# EAGLE board CouplerDC_Quad_v1 (EAGLE 9.2.2)
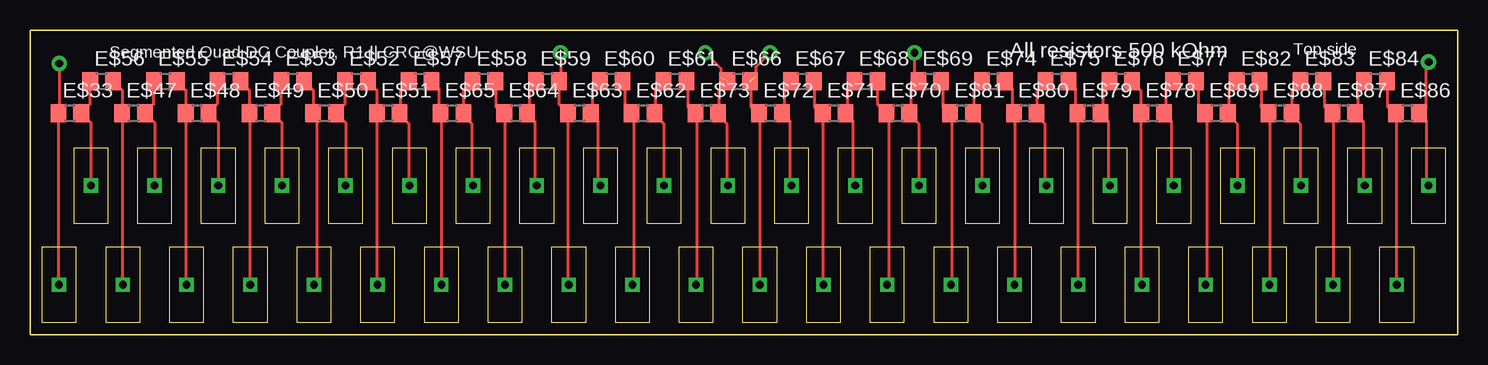
[diagram p0: board, top side]

Size 118.97 x 25.4 mm. Coordinates in mm from the lower left corner, seen from the top.
Outline: 0,0 118.97,0 118.97,25.4 0,25.4 0,0
Copper layers (1*16): Top 0.035mm / dielectric 1.5mm / Bottom 0.035mm
Design rules "default": minimum track width 10mil, minimum drill 24mil, track to track 8mil, track to pad 8mil, pad to pad 8mil, via to via 8mil, smd to smd 8mil, copper to edge 40mil, drill to drill 8mil, minimum pad ring 10mil, minimum via ring 8mil, stop-mask expansion 4mil, vias tented up to drill 0mil, thermal gap 10mil
Milling: 4 lines

## Footprints (pad centres in the part's own frame; a part is rotated, then mirrored left to right if it is on the bottom)
SLOT_QUAD_V1 = drill 0.635 pad 1.194 square: P$1 0,0
R0805 = smd 1.3 x 1.5: 1 -0.95,0; 2 0.95,0

## Placement (x,y rotation side)
E$1  [SLOT_QUAD_V1]  2.43,4.17 90 top
E$3  [SLOT_QUAD_V1]  5.07,12.43 90 top
E$4  [SLOT_QUAD_V1]  7.74,4.17 90 top
E$5  [SLOT_QUAD_V1]  13.04,4.17 90 top
E$6  [SLOT_QUAD_V1]  18.35,4.17 90 top
E$7  [SLOT_QUAD_V1]  23.66,4.17 90 top
E$8  [SLOT_QUAD_V1]  10.38,12.43 90 top
E$9  [SLOT_QUAD_V1]  28.97,4.17 90 top
E$10  [SLOT_QUAD_V1]  15.69,12.43 90 top
E$11  [SLOT_QUAD_V1]  34.28,4.17 90 top
E$12  [SLOT_QUAD_V1]  39.58,4.17 90 top
E$13  [SLOT_QUAD_V1]  21,12.43 90 top
E$14  [SLOT_QUAD_V1]  44.89,4.17 90 top
E$15  [SLOT_QUAD_V1]  50.2,4.17 90 top
E$16  [SLOT_QUAD_V1]  55.51,4.17 90 top
E$17  [SLOT_QUAD_V1]  60.82,4.17 90 top
E$18  [SLOT_QUAD_V1]  26.3,12.43 90 top
E$19  [SLOT_QUAD_V1]  31.61,12.43 90 top
E$20  [SLOT_QUAD_V1]  66.12,4.17 90 top
E$21  [SLOT_QUAD_V1]  71.43,4.17 90 top
E$22  [SLOT_QUAD_V1]  76.74,4.17 90 top
E$23  [SLOT_QUAD_V1]  82.05,4.17 90 top
E$24  [SLOT_QUAD_V1]  87.36,4.17 90 top
E$25  [SLOT_QUAD_V1]  92.66,4.17 90 top
E$26  [SLOT_QUAD_V1]  97.97,4.17 90 top
E$27  [SLOT_QUAD_V1]  103.28,4.17 90 top
E$28  [SLOT_QUAD_V1]  108.59,4.17 90 top
E$29  [SLOT_QUAD_V1]  113.9,4.17 90 top
E$30  [SLOT_QUAD_V1]  36.92,12.43 90 top
E$31  [SLOT_QUAD_V1]  42.23,12.43 90 top
E$32  [SLOT_QUAD_V1]  47.54,12.43 90 top
E$33  [R0805]  3.32,18.48 0 top
E$34  [SLOT_QUAD_V1]  52.84,12.43 90 top
E$35  [SLOT_QUAD_V1]  58.15,12.43 90 top
E$36  [SLOT_QUAD_V1]  63.46,12.43 90 top
E$37  [SLOT_QUAD_V1]  68.77,12.43 90 top
E$38  [SLOT_QUAD_V1]  74.08,12.43 90 top
E$39  [SLOT_QUAD_V1]  79.38,12.43 90 top
E$40  [SLOT_QUAD_V1]  84.69,12.43 90 top
E$41  [SLOT_QUAD_V1]  90,12.43 90 top
E$42  [SLOT_QUAD_V1]  95.31,12.43 90 top
E$43  [SLOT_QUAD_V1]  100.62,12.43 90 top
E$44  [SLOT_QUAD_V1]  105.92,12.43 90 top
E$45  [SLOT_QUAD_V1]  111.23,12.43 90 top
E$46  [SLOT_QUAD_V1]  116.54,12.43 90 top
E$47  [R0805]  8.62,18.48 0 top
E$48  [R0805]  13.93,18.48 0 top
E$49  [R0805]  19.24,18.48 0 top
E$50  [R0805]  24.55,18.48 0 top
E$51  [R0805]  29.86,18.48 0 top
E$52  [R0805]  27.2,21.14 0 top
E$53  [R0805]  21.89,21.14 0 top
E$54  [R0805]  16.59,21.14 0 top
E$55  [R0805]  11.28,21.14 0 top
E$56  [R0805]  5.97,21.14 0 top
E$57  [R0805]  32.51,21.14 0 top
E$58  [R0805]  37.82,21.14 0 top
E$59  [R0805]  43.13,21.14 0 top
E$60  [R0805]  48.43,21.14 0 top
E$61  [R0805]  53.74,21.14 0 top
E$62  [R0805]  51.09,18.48 0 top
E$63  [R0805]  45.78,18.48 0 top
E$64  [R0805]  40.47,18.48 0 top
E$65  [R0805]  35.16,18.48 0 top
E$66  [R0805]  59.05,21.14 0 top
E$67  [R0805]  64.36,21.14 0 top
E$68  [R0805]  69.67,21.14 0 top
E$69  [R0805]  74.97,21.14 0 top
E$70  [R0805]  72.32,18.48 0 top
E$71  [R0805]  67.01,18.48 0 top
E$72  [R0805]  61.7,18.48 0 top
E$73  [R0805]  56.4,18.48 0 top
E$74  [R0805]  80.28,21.14 0 top
E$75  [R0805]  85.59,21.14 0 top
E$76  [R0805]  90.9,21.14 0 top
E$77  [R0805]  96.21,21.14 0 top
E$78  [R0805]  93.55,18.48 0 top
E$79  [R0805]  88.24,18.48 0 top
E$80  [R0805]  82.94,18.48 0 top
E$81  [R0805]  77.63,18.48 0 top
E$82  [R0805]  101.52,21.14 0 top
E$83  [R0805]  106.82,21.14 0 top
E$84  [R0805]  112.13,21.14 0 top
E$86  [R0805]  114.78,18.48 0 top
E$87  [R0805]  109.48,18.48 0 top
E$88  [R0805]  104.17,18.48 0 top
E$89  [R0805]  98.86,18.48 0 top

## Library data of the parts
E$1 E$3-E$32 E$34-E$46 = SLOTS_Quad
E$33 E$47-E$84 E$86-E$89 = GAAextensions

## Nets
S$1: E$14.P$1 E$59.2 E$63.1
S$51: E$6.P$1 E$49.1 E$54.2
S$53: E$4.P$1 E$47.1 E$56.2
S$54: E$13.P$1 E$49.2 E$53.1
S$55: E$7.P$1 E$50.1 E$53.2
S$56: E$19.P$1 E$51.2 E$57.1
S$57: E$11.P$1 E$57.2 E$65.1
S$58: E$18.P$1 E$50.2 E$52.1
S$59: E$8.P$1 E$47.2 E$55.1
S$60: E$5.P$1 E$48.1 E$55.2
S$61: E$10.P$1 E$48.2 E$54.1
S$62: E$9.P$1 E$51.1 E$52.2
S$63: E$30.P$1 E$58.1 E$65.2
S$64: E$12.P$1 E$58.2 E$64.1
S$65: E$31.P$1 E$59.1 E$64.2
S$66: E$1.P$1 E$33.1
S$67: E$32.P$1 E$60.1 E$63.2
S$68: E$15.P$1 E$60.2 E$62.1
S$69: E$34.P$1 E$61.1 E$62.2
S$70: E$16.P$1 E$61.2 E$73.1
S$71: E$35.P$1 E$66.1 E$73.2
S$72: E$17.P$1 E$66.2 E$72.1
S$74: E$36.P$1 E$67.1 E$72.2
S$75: E$20.P$1 E$67.2 E$71.1
S$76: E$37.P$1 E$68.1 E$71.2
S$77: E$21.P$1 E$68.2 E$70.1
S$78: E$38.P$1 E$69.1 E$70.2
S$79: E$22.P$1 E$69.2 E$81.1
S$80: E$39.P$1 E$74.1 E$81.2
S$81: E$23.P$1 E$74.2 E$80.1
S$82: E$40.P$1 E$75.1 E$80.2
S$83: E$24.P$1 E$75.2 E$79.1
S$84: E$41.P$1 E$76.1 E$79.2
S$85: E$25.P$1 E$76.2 E$78.1
S$86: E$42.P$1 E$77.1 E$78.2
S$87: E$26.P$1 E$77.2 E$89.1
S$88: E$43.P$1 E$82.1 E$89.2
S$89: E$27.P$1 E$82.2 E$88.1
S$90: E$44.P$1 E$83.1 E$88.2
S$91: E$28.P$1 E$83.2 E$87.1
S$92: E$45.P$1 E$84.1 E$87.2
S$93: E$29.P$1 E$84.2 E$86.1
S$94: E$46.P$1 E$86.2
S$96: E$3.P$1 E$33.2 E$56.1

## Tracks (layer width: path | path; a pad name or v marks a point on that pad's centre or on a via)
S$1  (via drill 0.65 pad 1.27)
  Top 0.254: 44.11,21.03 44.12,21.01 44.12,19.18 44.81,18.49 E$63.1 44.81,18.26 44.81,4.32 E$14.P$1 45.03,4.32 | 44.11,21.03 E$59.2 | v44.21,23.5 44.21,21.13 44.11,21.03
S$51
  Top 0.254: 18.29,4.32 E$6.P$1 18.35,18.71 18.29,18.77 | E$54.2 18.29,20.38 18.29,18.77 | 18.29,18.77 E$49.1
S$53
  Top 0.254: E$56.2 7.67,20.38 E$47.1 7.67,4.24 E$4.P$1
S$54
  Top 0.254: 21.03,12.55 E$13.P$1 21,17.68 E$49.2 20.95,19.24 E$53.1
S$55
  Top 0.254: 23.77,4.32 E$7.P$1 23.88,3.96 | E$53.2 23.6,20.38 E$50.1 23.88,18.21 23.88,3.96 | 23.88,3.68 23.88,3.96
S$56
  Top 0.254: 31.78,12.55 E$19.P$1 31.55,12.55 31.55,17.58 30.86,18.26 E$51.2 30.86,18.49 30.86,20.32 31.55,21.01 E$57.1
S$57
  Top 0.254: E$57.2 33.6,21.01 34.06,20.55 34.06,18.49 E$65.1 34.29,18.26 34.29,4.32 E$11.P$1
S$58
  Top 0.254: 26.29,12.55 E$18.P$1 26.3,17.68 E$50.2 26.25,19.24 E$52.1
S$59
  Top 0.254: 10.39,12.44 E$8.P$1 10.38,17.68 E$47.2 10.33,19.24 E$55.1
S$60
  Top 0.254: E$5.P$1 12.98,4.24 E$48.1 12.98,20.38 E$55.2
S$61
  Top 0.254: 15.77,12.55 E$10.P$1 15.69,17.68 E$48.2 15.64,19.24 E$54.1
S$62
  Top 0.254: 29.03,4.32 E$9.P$1 28.91,4.24 E$51.1 28.91,20.38 E$52.2
S$63
  Top 0.254: 37.03,12.55 E$30.P$1 36.8,12.55 36.8,17.58 36.12,18.26 E$65.2 36.12,20.32 36.8,21.01 E$58.1
S$64
  Top 0.254: E$58.2 38.86,21.01 38.86,18.95 39.32,18.49 E$64.1 39.55,18.26 39.55,4.32 E$12.P$1
S$65
  Top 0.254: 42.29,12.55 E$31.P$1 42.06,12.55 42.06,17.8 41.6,18.26 E$64.2 41.6,18.49 41.6,20.55 42.06,21.01 E$59.1
S$66  (via drill 0.65 pad 1.27)
  Top 0.254: v2.43,22.61 2.43,18.54 E$33.1 2.37,4.24 E$1.P$1
S$67
  Top 0.254: 47.55,12.55 E$32.P$1 47.32,12.55 47.32,17.8 46.86,18.26 E$63.2 46.86,18.49 46.86,20.55 47.32,21.01 E$60.1
S$68
  Top 0.254: E$60.2 49.61,21.01 49.61,18.95 50.06,18.49 E$62.1 50.29,18.26 50.29,4.32 E$15.P$1
S$69
  Top 0.254: E$61.1 52.58,21.01 52.12,20.55 52.12,18.49 E$62.2 52.12,18.26 52.81,17.58 52.81,12.55 E$34.P$1
S$70
  Top 0.254: E$61.2 54.86,21.01 54.86,18.95 55.32,18.49 E$73.1 55.55,18.26 55.55,4.32 E$16.P$1
S$71  (via drill 0.65 pad 1.27)  (1 unrouted)
  Top 0.254: 58.29,12.55 E$35.P$1 58.06,12.55 58.06,17.58 57.38,18.26 E$73.2 57.38,18.49 57.38,20.32 58.06,21.01 E$66.1 | v56.28,23.5 57.56,22.21 57.56,21.41
S$72  (via drill 0.65 pad 1.27)  (1 unrouted)
  Top 0.254: E$66.2 60.12,21.01 60.12,18.95 60.58,18.49 E$72.1 60.81,18.26 60.81,4.32 E$17.P$1 | v61.66,23.5 60.48,22.31 60.48,21.57
S$74
  Top 0.254: 63.55,12.55 E$36.P$1 63.32,12.55 63.32,17.8 62.86,18.26 E$72.2 62.86,18.49 62.86,20.55 63.32,21.01 E$67.1
S$75
  Top 0.254: E$67.2 65.38,21.01 65.38,18.95 65.84,18.49 E$71.1 66.06,18.26 66.06,4.32 E$20.P$1
S$76
  Top 0.254: 68.81,12.55 E$37.P$1 68.58,12.55 68.58,17.8 68.12,18.26 E$71.2 68.12,18.49 68.12,20.55 68.58,21.01 E$68.1
S$77
  Top 0.254: E$68.2 70.64,21.01 70.64,19.18 71.32,18.49 E$70.1 71.55,18.26 71.55,4.32 E$21.P$1
S$78  (via drill 0.65 pad 1.27)
  Top 0.254: 73.95,21.09 73.84,21.01 73.38,20.55 73.38,18.49 E$70.2 73.38,18.26 74.07,17.58 74.07,12.55 E$38.P$1 | 73.95,21.09 E$69.1 | v73.7,23.5 73.7,21.34 73.95,21.09
S$79
  Top 0.254: E$69.2 76.12,21.01 76.12,18.95 76.58,18.49 E$81.1 76.81,18.26 76.81,4.32 E$22.P$1
S$80
  Top 0.254: 79.55,12.55 E$39.P$1 79.32,12.55 79.32,17.58 78.64,18.26 E$81.2 78.64,18.49 78.64,20.32 79.32,21.01 E$74.1
S$81
  Top 0.254: E$74.2 81.38,21.01 81.84,20.55 81.84,18.49 E$80.1 82.07,18.26 82.07,4.32 E$23.P$1
S$82
  Top 0.254: 84.81,12.55 E$40.P$1 84.58,12.55 84.58,17.58 83.9,18.26 E$80.2 83.9,20.32 84.58,21.01 E$75.1
S$83
  Top 0.254: E$75.2 86.64,21.01 87.1,20.55 87.1,18.49 E$79.1 87.33,18.26 87.33,4.32 E$24.P$1
S$84
  Top 0.254: 90.07,12.55 E$41.P$1 89.84,12.55 89.84,17.8 89.38,18.26 E$79.2 89.38,18.49 89.38,20.55 89.84,21.01 E$76.1
S$85
  Top 0.254: 92.81,4.32 E$25.P$1 92.58,4.32 92.58,18.26 E$78.1 92.58,18.49 92.58,20.32 91.9,21.01 E$76.2
S$86
  Top 0.254: 95.33,12.55 E$42.P$1 95.1,12.55 95.1,17.8 94.64,18.26 E$78.2 94.64,18.49 94.64,20.55 95.1,21.01 E$77.1
S$87
  Top 0.254: E$77.2 97.38,21.01 97.38,18.95 97.84,18.49 E$89.1 98.07,18.26 98.07,4.32 E$26.P$1
S$88
  Top 0.254: E$82.1 100.36,21.01 99.9,20.55 99.9,18.49 E$89.2 99.9,18.26 100.58,17.58 100.58,12.55 E$43.P$1
S$89
  Top 0.254: E$82.2 102.64,21.01 102.64,18.95 103.1,18.49 E$88.1 103.33,18.26 103.33,4.32 E$27.P$1
S$90
  Top 0.254: 106.07,12.55 E$44.P$1 105.84,12.55 105.84,17.58 105.16,18.26 E$88.2 105.16,18.49 105.16,20.32 105.84,21.01 E$83.1
S$91
  Top 0.254: E$83.2 107.9,21.01 107.9,18.95 108.36,18.49 E$87.1 108.58,18.26 108.58,4.32 E$28.P$1
S$92
  Top 0.254: 111.33,12.55 E$45.P$1 111.1,12.55 111.1,17.8 110.64,18.26 E$87.2 110.64,18.49 110.64,20.55 111.1,21.01 E$84.1
S$93
  Top 0.254: E$84.2 113.16,21.01 113.16,18.95 113.61,18.49 E$86.1 113.84,18.26 113.84,4.32 E$29.P$1
S$94  (via drill 0.65 pad 1.27)
  Top 0.254: 116.59,12.55 E$46.P$1 116.36,12.55 116.36,17.8 115.9,18.26 E$86.2 115.9,18.49 116.36,18.95 116.36,22.61 v116.55,22.73
S$96
  Top 0.254: 5.08,12.44 E$3.P$1 5.07,17.68 E$33.2 5.02,19.24 E$56.1

## Text on the board
tPlace: Segmented Quad DC Coupler, R1 || CRG@WSU | All resistors 500 kOhm | Top side